# EAGLE board Slave_NFC (EAGLE 6.3)
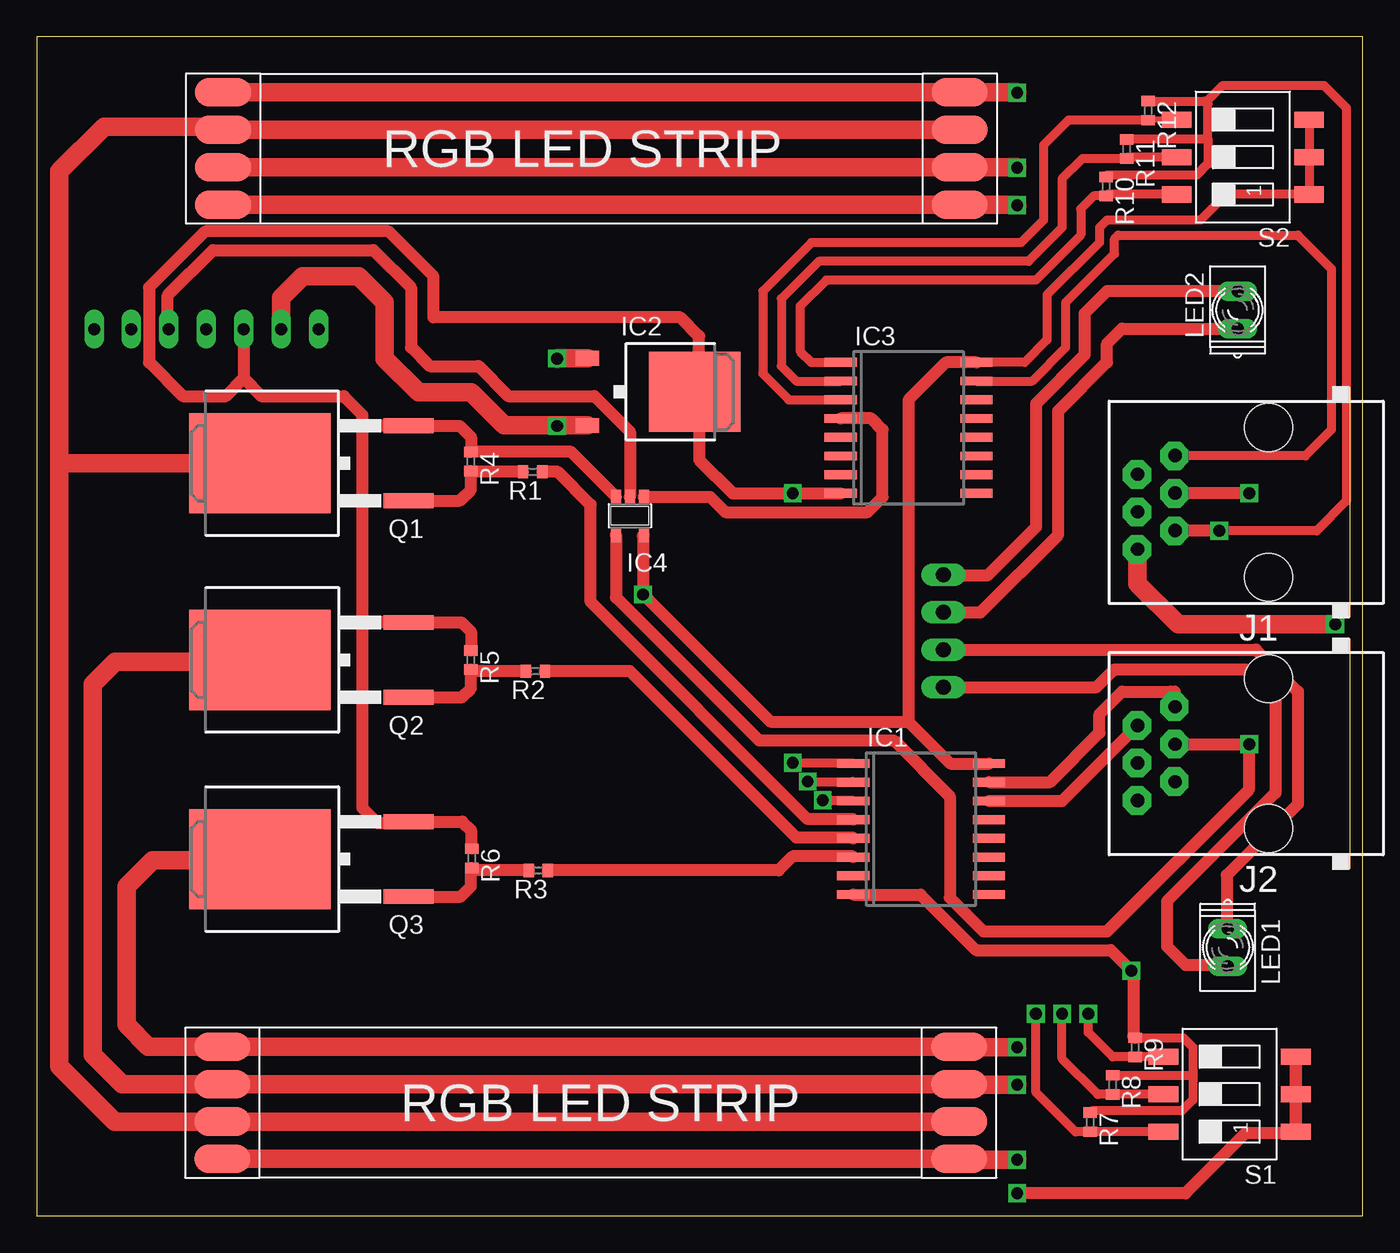
[diagram p0: board, top side]
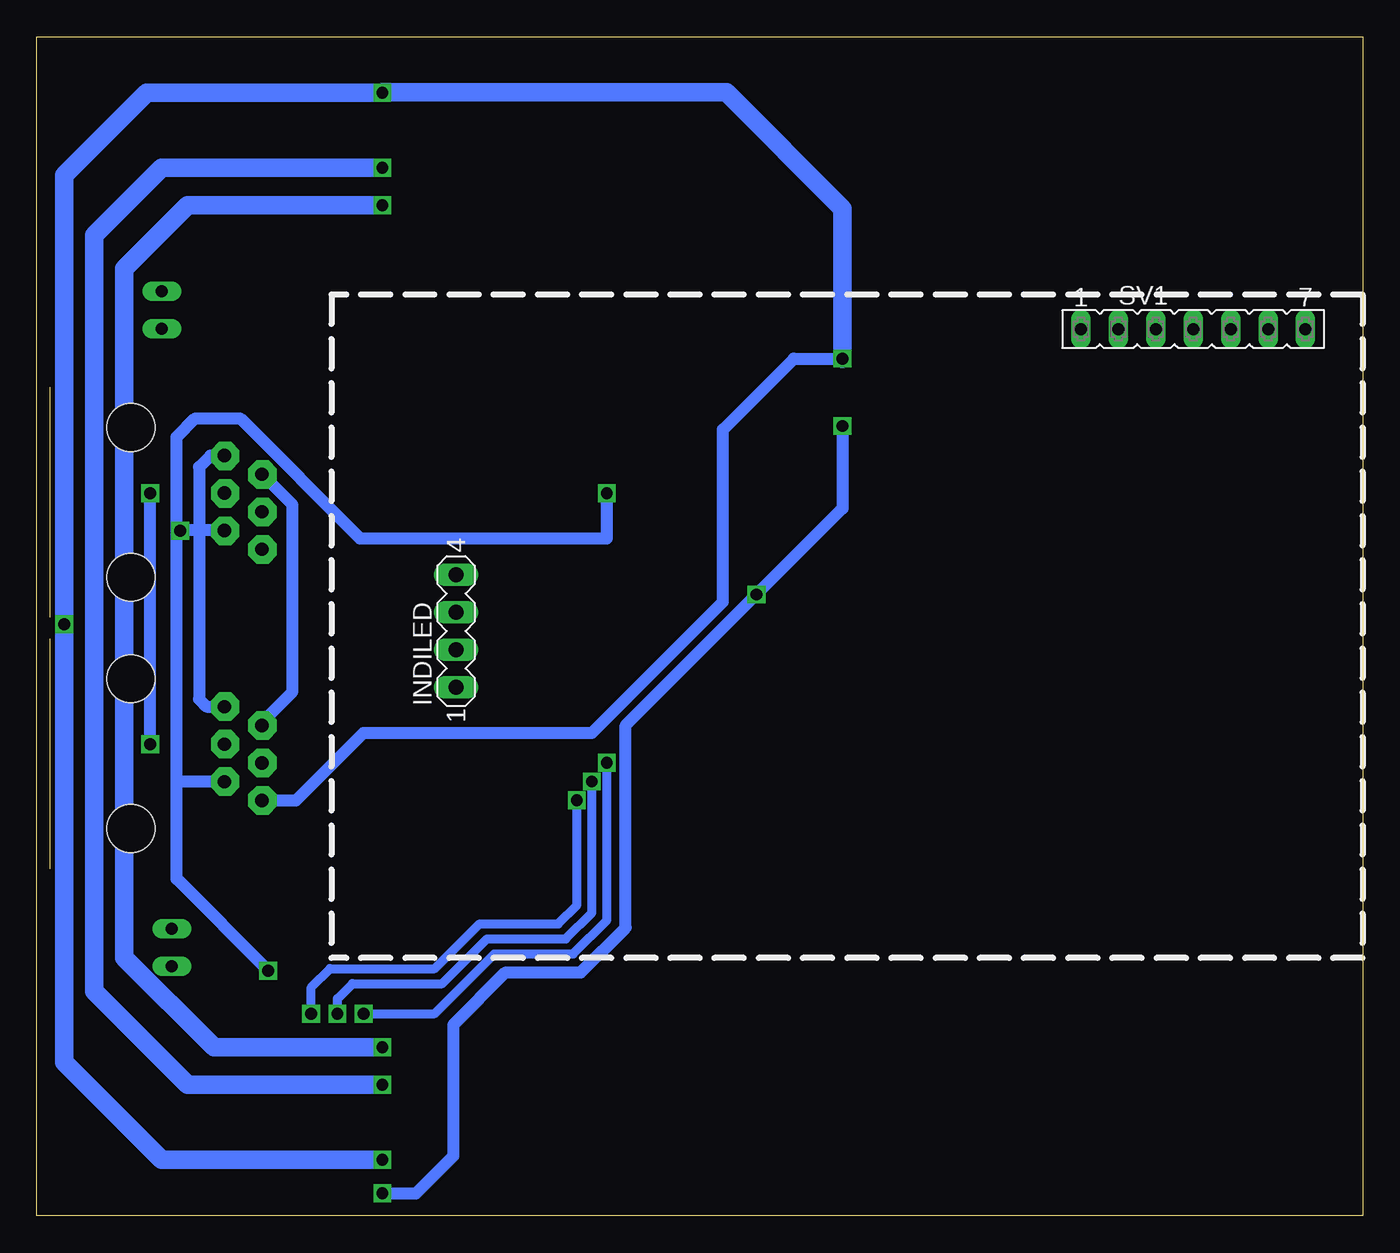
[diagram p1: board, bottom side, seen from below]

Size 90 x 80 mm. Coordinates in mm from the lower left corner, seen from the top.
Outline: 0,0 90,0 90,80 0,80 0,0
Copper layers (1*16): Top 0.035mm / dielectric 1.5mm / Bottom 0.035mm
Design rules "default": minimum track width 10mil, minimum drill 24mil, track to track 8mil, track to pad 8mil, pad to pad 8mil, via to via 8mil, smd to smd 8mil, copper to edge 40mil, drill to drill 8mil, minimum pad ring 10mil, minimum via ring 8mil, stop-mask expansion 4mil, vias tented up to drill 0mil, thermal gap 10mil

## Footprints (pad centres in the part's own frame; a part is rotated, then mirrored left to right if it is on the bottom)
SO16W = smd 0.6 x 2.2: 1 -4.445,-4.6; 2 -3.175,-4.6; 3 -1.905,-4.6; 4 -0.635,-4.6; 5 0.635,-4.6; 6 1.905,-4.6; 7 3.175,-4.6; 8 4.445,-4.6; 9 4.445,4.6; 10 3.175,4.6; 11 1.905,4.6; 12 0.635,4.6; 13 -0.635,4.6; 14 -1.905,4.6; 15 -3.175,4.6; 16 -4.445,4.6
TO252 = smd 1 x 1.6: 1 -2.28,-4.8; 2 2.28,-4.8 | smd 5.4 x 6.2: 3 0,2.5
SOT23-5 = smd 0.69 x 0.99: 1 -0.95,-1.29; 2 0,-1.29; 3 0.95,-1.29; 4 0.95,1.3; 5 -0.95,1.3
MA04-1 = drill 1.016 long: 1 -3.81,0; 2 -1.27,0; 3 1.27,0; 4 3.81,0
RJ11-NO_SHIELD = drill 0.9 pad 1.4: 1 -3.175,8.89; 2 -1.905,6.35; 3 -0.635,8.89; 4 0.635,6.35; 5 1.905,8.89; 6 3.175,6.35 | hole 3.251: -5.08,0; 5.08,0
Q62902-B152 = drill 0.813 long: A 1.27,0; K -1.27,0
TO263 = smd 1 x 3.4: 1 -2.54,-6.6; 2 2.54,-6.6 | smd 6.8 x 9.6: 3 0,3.5
R0402 = smd 0.7 x 0.9: 1 -0.65,0; 2 0.65,0
SMS-003 = smd 1.092 x 2.007: 1 -2.54,-4.496; 2 0,-4.496; 3 2.54,-4.496; 4 2.54,4.496; 5 0,4.496; 6 -2.54,4.496
FE07 = drill 0.813 long: 1 -7.62,0; 2 -5.08,0; 3 -2.54,0; 4 0,0; 5 2.54,0; 6 5.08,0; 7 7.62,0
LED_P = smd 3.81 x 1.93: + -24.13,3.81; +1 25.87,3.81; B -24.13,1.27; B1 25.87,1.27; G -24.13,-3.81; G1 25.87,-3.81; R -24.13,-1.27; R1 25.87,-1.27

## Placement (x,y rotation side)
IC1  PCF8574T  [SO16W]  60.03,26.25 270 top
IC2  7805DT  [TO252]  42.17,55.91 270 top
IC3  PCF8574T  [SO16W]  59.18,53.47 270 top
IC4  74AHC1G126DBV  [SOT23-5]  40.26,47.5 180 top
INDILED  [MA04-1]  61.54,39.68 90 bottom
J1  RJ11-2L-B  [RJ11-NO_SHIELD]  83.61,48.41 90 top
J2  RJ11-2L-B  [RJ11-NO_SHIELD]  83.61,31.36 90 top
LED1  [Q62902-B152]  80.84,18.21 270 top
LED2  [Q62902-B152]  81.51,61.47 90 top
Q1  SPB80P06P  [TO263]  18.63,51.06 90 top
Q2  SPB80P06P  [TO263]  18.64,37.72 90 top
Q3  SPB80P06P  [TO263]  18.64,24.2 90 top
R1  10Ω  [R0402]  33.66,50.48 180 top
R2  10Ω  [R0402]  33.85,36.96 180 top
R3  10Ω  [R0402]  34.04,23.43 180 top
R4  2.7MΩ  [R0402]  29.46,51.18 270 top
R5  2.7MΩ  [R0402]  29.46,37.72 270 top
R6  2.7MΩ  [R0402]  29.53,24.26 270 top
R7  4k7  [R0402]  71.5,6.35 270 top
R8  4k7  [R0402]  73.03,8.89 270 top
R9  4k7  [R0402]  74.55,11.43 270 top
R10  4k7  [R0402]  72.58,69.85 270 top
R11  4k7  [R0402]  73.98,72.39 270 top
R12  4k7  [R0402]  75.44,74.99 270 top
S1  SWS003  [SMS-003]  80.96,8.26 90 top
S2  SWS003  [SMS-003]  81.87,71.84 90 top
SV1  [FE07]  11.5,60.17 0 bottom
U$1  LED_S  [LED_P]  36.78,72.42 0 top
U$2  LED_S  [LED_P]  38.47,7.67 180 top

## Library data of the parts
IC1 IC3 = micro-philips; MPN: PCF8574T/3,512; OC_FARNELL: 1201255; OC_NEWARK: 70R6870
IC2 = linear
IC4 = 74xx-little-de
INDILED = con-lstb; OC_FARNELL: unknown; OC_NEWARK: unknown
J1 J2 = con-tycoelectronics; MF: TYCO ELECTRONICS; MPN: RJ11-2L-B; OC_FARNELL: unknown; OC_NEWARK: 83F4463
LED1 LED2 = led
Q1-Q3 = F3205S
R1-R12 = rcl
S1 S2 = smd-special
SV1 = con-lsta; OC_FARNELL: unknown; OC_NEWARK: unknown
U$1 U$2 = Onboard_LEDstrip

## Nets
AGND: IC1.8 IC2.3 IC3.8 IC4.3 J1.2 J2.2 Q1.2 Q2.2 Q3.2 R4.1 R5.1 R6.1 R7.1 R8.1 R9.1 R10.1 R11.1 R12.1 SV1.3
N$1: IC1.15 IC3.15 J1.6 J2.6
N$2: IC4.4 J1.4 J2.4
N$3: IC1.14 J1.5 J2.5
N$4: Q1.1 R1.2 R4.2
N$5: Q2.1 R2.2 R5.2
N$6: Q3.1 R3.2 R6.2
N$7: Q1.3 U$1.B U$1.B1 U$2.B U$2.B1
N$8: Q2.3 U$1.R U$1.R1 U$2.R U$2.R1
N$9: Q3.3 U$1.G U$1.G1 U$2.G U$2.G1
N$10: IC2.1 J1.1 J2.1 U$1.+ U$1.+1 U$2.+ U$2.+1
N$11: IC3.1 R10.2 S2.6
N$12: IC1.1 R7.2 S1.6
N$13: IC1.2 R8.2 S1.5
N$14: IC1.3 R9.2 S1.4
N$15: IC3.4 IC4.1
N$16: IC1.4 R1.1
N$17: IC1.5 R2.1
N$18: IC1.6 R3.1
N$19: IC3.2 R11.2 S2.5
N$20: IC3.3 R12.2 S2.4
N$21: IC1.16 IC2.2 IC3.16 IC4.5 S1.1 S1.2 S1.3 S2.1 S2.2 S2.3 SV1.2
N$22: INDILED.1 LED1.A
N$23: INDILED.4 LED2.A
N$24: INDILED.2 LED1.K
N$25: INDILED.3 LED2.K
N$27: IC4.2 SV1.5

## Tracks (layer width: path | path; a pad name or v marks a point on that pad's centre or on a via)
AGND  (via drill 0.8)
  Top 0.406: 72.58,70.61 R10.1
  Top 0.61: R12.1 79.3,75.64 79.5,75.44 | 79.5,73.04 R11.1 | 79.5,73.04 79.5,71.37 78.74,70.61 72.69,70.61 R10.1 | 79.5,73.04 79.5,75.44 | v80.26,46.48 86.87,46.48 88.9,48.51 88.9,75.18 87.38,76.71 80.52,76.71 79.5,75.69 79.5,75.44 | R9.1 77.84,12.08 78.49,11.43 78.49,9.4 | 78.49,9.4 78.49,7.87 77.72,7.11 71.61,7.11 R7.1 | R8.1 78.34,9.54 78.49,9.4
  Top 0.813: R6.1 29.46,24.97 29.46,26.16 28.88,26.74 Q3.2 25.17,26.67 23.11,26.67 22.1,27.69 22.1,40.13 | R5.1 29.46,39.62 28.83,40.26 Q2.2 22.23,40.26 22.1,40.13 | 22.1,52.83 22.11,53.6 Q1.2 28.69,53.6 29.46,52.83 R4.1 36.27,51.83 IC4.3 | 22.1,52.83 22.1,40.13 | 14.04,56.83 15.24,55.63 20.83,55.63 22.1,54.36 22.1,52.83 | SV1.3 14.04,56.83 | IC2.3 44.96,56.21 | 44.96,56.21 44.96,59.69 43.69,60.96 26.92,60.96 26.92,63.75 23.88,66.8 11.43,66.8 7.62,62.99 7.62,57.91 9.91,55.63 12.84,55.63 14.04,56.83 | 44.96,56.21 44.96,51.31 47.24,49.02 v51.31,49.02 IC3.8 | IC1.8 59.99,21.8 63.75,18.03 72.9,18.03 v74.3,16.64 74.42,16.51 74.42,12.21 R9.1 | v80.26,46.48 77.28,46.48 J1.2
  Bottom 0.813: 80.52,29.46 80.52,22.86 v74.3,16.64 | 80.52,29.46 80.52,46.23 v80.26,46.48 | J2.2 80.51,29.45 80.52,29.46 | J1.2 80.5,46.51 80.52,46.48 80.52,52.83 79.25,54.1 76.2,54.1 68.07,45.97 51.31,45.97 v51.31,49.02
N$1
  Top 0.61: IC3.15 67.56,56.64 69.85,58.93 69.85,61.98 73.15,65.28 73.15,66.29 73.41,66.55 85.6,66.55 87.88,64.26 87.88,53.34 86.11,51.56 77.28,51.56 J1.6 | 77.27,34.54 J2.6
  Top 0.813: IC1.15 68.79,29.42 72.14,32.77 72.14,34.04 73.66,35.56 76.96,35.56 77.22,35.31 | 77.22,35.56 77.22,35.31 | 77.22,35.31 77.22,34.58 J2.6
  Bottom 0.813: J2.6 77.27,34.54 78.49,34.54 78.61,34.67 78.74,34.8 78.99,35.05 78.99,50.8 78.21,51.59 J1.6
N$2  (via drill 0.8)
  Top 0.813: IC4.4 39.31,41.97 49.02,32.26 58.17,32.26 61.98,28.45 61.98,21.59 64.26,19.3 72.64,19.3 82.3,28.96 v82.3,32 J2.4 | v82.3,49.02 77.28,49.02 J1.4
  Bottom 0.813: 77.28,49.02 J1.4 | v82.3,32 v82.3,49.02
N$3
  Top 0.813: IC1.14 69.61,28.15 J2.5
  Bottom 0.813: J2.5 74.72,33.48 72.64,35.56 72.64,48.24 J1.5
N$4
  Top 0.813: Q1.1 28.71,48.52 29.46,49.28 R4.2 29.51,50.48 R1.2
N$5
  Top 0.813: Q2.1 28.83,35.18 29.46,35.81 R5.2 29.58,36.96 R2.2
N$6
  Top 0.813: Q3.1 28.77,21.66 29.46,22.35 29.46,23.54 R6.2 29.7,23.43 R3.2
N$7
  Top 1.27: U$2.B U$2.B1 5.29,6.4 1.52,10.16 1.52,51.05 | 12.06,73.69 U$1.B 13.21,73.69 | U$1.B1 13.21,73.69 | 1.52,51.05 1.52,70.87 4.57,73.91 12.98,73.91 13.21,73.69 | Q1.3 1.53,51.06 1.52,51.05
N$8  (via drill 0.8)
  Top 1.27: U$1.R1 U$1.R 66.52,71.14 v66.55,71.12 | Q2.3 11.71,37.34 11.94,37.34 11.68,37.59 5.33,37.59 3.81,36.07 3.81,10.92 5.79,8.94 U$2.R1 61.91,8.94 61.91,9.21 62.6,9.21 U$2.R 62.65,8.89 v66.55,8.89
  Bottom 1.27: v66.55,71.12 81.53,71.12 86.11,66.55 86.11,15.24 79.76,8.89 v66.55,8.89
N$9  (via drill 0.8)
  Top 1.27: U$1.G1 U$1.G 66.52,68.61 v66.55,68.58 | v66.55,11.43 62.65,11.43 U$2.G U$2.G1 7.57,11.48 6.1,12.95 6.1,22.35 7.87,24.13 15.07,24.13 Q3.3
  Bottom 1.27: v66.55,68.58 79.76,68.58 84.07,64.26 84.07,17.53 77.98,11.43 v66.55,11.43
N$10  (via drill 0.8)
  Top 1.27: U$2.+1 U$2.+ 62.65,3.81 v66.55,3.81 | U$1.+ U$1.+1 66.52,76.22 v66.55,76.2 | J1.1 74.72,42.88 77.47,40.13 v88.14,40.13 | IC2.1 35.34,58.2 v35.31,58.17
  Bottom 0.813: J2.1 72.4,28.18 67.82,32.77 52.32,32.77 43.43,41.66 43.43,53.34 38.61,58.17 v35.31,58.17
  Bottom 1.27: v66.55,3.81 81.53,3.81 88.14,10.41 v88.14,40.13 88.14,70.61 82.55,76.2 v66.55,76.2 66.52,76.22 43.18,76.22 35.31,68.35 v35.31,58.17
N$11
  Top 0.406: 72.58,69.3 R10.2
  Top 0.61: S2.6 72.68,69.3 R10.2 71.74,69.2 70.87,68.33 70.87,66.55 67.82,63.5 53.59,63.5 51.82,61.72 51.82,58.67 52.58,57.91 IC3.1
N$12  (via drill 0.8)
  Top 0.61: S1.6 71.52,5.71 R7.2 70.5,5.7 67.82,8.38 v67.82,13.72 | v51.31,30.73 55.38,30.73 IC1.1
  Bottom 0.61: v67.82,13.72 62.99,13.72 58.93,17.78 53.59,17.78 51.31,20.07 v51.31,30.73
N$13  (via drill 0.8)
  Top 0.61: S1.5 73.04,8.26 R8.2 72.02,8.24 69.6,10.67 v69.6,13.72 | v52.32,29.46 55.38,29.46 IC1.2
  Bottom 0.61: v69.6,13.72 69.6,14.73 68.58,15.75 62.48,15.75 59.44,18.8 54.1,18.8 52.32,20.57 v52.32,29.46
N$14  (via drill 0.8)
  Top 0.61: S1.4 74.56,10.79 R9.2 73.04,10.78 71.37,12.45 v71.37,13.72 | v53.34,28.19 55.38,28.19 IC1.3
  Bottom 0.61: v71.37,13.72 71.37,15.49 70.1,16.76 62.99,16.76 59.94,19.81 54.61,19.81 53.34,21.08 v53.34,28.19
N$15
  Top 0.813: IC4.1 45.7,48.79 46.74,47.75 56.39,47.75 57.4,48.77 57.4,53.34 56.64,54.1 IC3.4
N$16
  Top 0.813: IC1.4 55.38,26.92 52.32,26.92 37.59,41.66 37.59,48.26 35.37,50.48 R1.1
N$17
  Top 0.813: IC1.5 55.38,25.65 51.56,25.65 40.26,36.96 R2.1
N$18
  Top 0.813: IC1.6 55.38,24.38 51.31,24.38 50.35,23.43 R3.1
N$19
  Top 0.406: 73.98,71.84 R11.2
  Top 0.61: S2.5 74.08,71.84 R11.2 70.98,71.74 69.6,70.36 69.6,67.06 67.31,64.77 53.09,64.77 50.55,62.23 50.55,57.66 51.56,56.64 IC3.2
N$20
  Top 0.406: S2.4 75.44,74.38 R12.2
  Top 0.61: R12.2 70.03,74.34 68.33,72.64 68.33,67.56 66.8,66.04 52.58,66.04 49.28,62.74 49.28,57.15 51.05,55.37 IC3.3
N$21  (via drill 0.8)
  Top 0.61: S2.3 S2.2 S2.1 80.73,69.3 78.99,67.56 72.64,67.56 72.14,67.06 72.14,66.04 68.58,62.48 68.58,59.44 67.06,57.91 IC3.16
  Top 0.813: IC4.5 41.15,46.14 v41.15,42.16 49.78,33.53 59.18,33.53 | 59.18,33.53 62.02,30.69 IC1.16 | IC2.2 35.35,53.63 v35.31,53.59 | IC3.16 61.72,57.91 59.18,55.37 59.18,33.53 | S1.1 S1.2 S1.3 S1.1 85.6,5.59 82.04,5.59 77.98,1.52 v66.55,1.52
  Top 1.27: SV1.2 16.58,62.3 18.03,63.75 21.84,63.75 23.62,61.98 23.62,58.17 25.91,55.88 29.46,55.88 31.71,53.63 IC2.2
  Bottom 0.813: v35.31,53.59 35.31,48.01 v41.15,42.16 50.04,33.27 50.04,19.56 53.09,16.51 58.17,16.51 61.72,12.95 61.72,4.06 64.26,1.52 v66.55,1.52
N$22
  Top 0.813: INDILED.1 71.94,35.87 73.15,37.08 82.04,37.08 84.07,35.05 84.07,28.7 76.71,21.34 76.71,18.29 77.98,17.02 80.77,17.02 LED1.A
N$23
  Top 0.813: LED2.A 72.64,62.74 71.12,61.21 71.12,58.42 67.82,55.12 67.82,46.74 64.52,43.43 61.6,43.43 INDILED.4
N$24
  Top 0.813: 81.02,19.3 LED1.K 80.77,19.55 80.77,23.11 85.6,27.94 85.6,35.56 82.75,38.41 INDILED.2
N$25
  Top 0.813: INDILED.3 64.06,40.95 69.34,46.23 69.34,54.61 72.64,57.91 72.64,59.18 73.66,60.2 LED2.K
N$26  (via drill 0.5 pad 1.93)
  other vias: 74.68,50.29
N$27
  Top 0.813: SV1.5 8.89,60.24 8.89,62.48 11.94,65.53 22.86,65.53 25.4,62.99 25.4,58.93 26.67,57.66 29.97,57.66 32,55.63 37.85,55.63 40.26,53.21 IC4.2
N$28  (via drill 0.5 pad 1.93)
  other vias: 77.22,51.56
N$29  (via drill 0.5 pad 1.93)
  other vias: 77.22,49.02
N$30  (via drill 0.5 pad 1.93)
  other vias: 74.68,47.75
N$31  (via drill 0.5 pad 1.93)
  other vias: 77.22,46.48
N$32  (via drill 0.5 pad 1.93)
  other vias: 74.68,45.21
N$33  (via drill 0.5 pad 1.93)
  other vias: 74.68,33.27
N$34  (via drill 0.5 pad 1.93)
  other vias: 74.68,30.73
N$35  (via drill 0.5 pad 1.93)
  other vias: 74.68,28.19
N$36  (via drill 0.5 pad 1.93)
  other vias: 77.22,29.46
N$37  (via drill 0.5 pad 1.93)
  other vias: 77.22,32
N$38  (via drill 0.5 pad 1.93)
  other vias: 77.22,34.54